# EAGLE board Fantastic Jaiks-Sango (EAGLE 9.7.0)

Size 220.81 x 114.8 mm. Coordinates in mm from the lower left corner, seen from the top.
Outline: 0,0 220.81,0 220.81,114.8 0,114.8 0,0
Copper layers (1*16): Top 0.035mm / dielectric 1.5mm / Bottom 0.035mm
Design rules "default": minimum track width 6mil, minimum drill 0.35mm, track to track 6mil, track to pad 6mil, pad to pad 6mil, via to via 6mil, smd to smd 6mil, copper to edge 40mil, drill to drill 6mil, minimum pad ring 10mil, minimum via ring 8mil, stop-mask expansion 4mil, vias tented up to drill 0mil, thermal gap 10mil

## Footprints (pad centres in the part's own frame; a part is rotated, then mirrored left to right if it is on the bottom)
BATTERY-GENERIC = drill 1.118 pad 3.15 octagon: + 2.54,0; - -2.54,0
LEDRD254W60D565H860B = drill 0.981 pad 1.581: 1 -1.27,0; 2 1.27,0
LEDRD254W60D565H860B_G = drill 0.981 pad 1.581: 1 -1.27,0; 2 1.27,0
MOTOR = drill 1.118 pad 3.15 octagon: + 2.54,0; - -2.54,0
RESAD1016W63L850D250B = drill 0.83 pad 1.43: 1 -5.08,0; 2 5.08,0
SWITCH-MOMENTARY-PTH-6.5MM = drill 1.016 pad 1.88: 1 -3.251,2.261; 2 3.251,2.261; 3 -3.251,-2.261; 4 3.251,-2.261
ARDUINO-UNO-R3-SHIELD = drill 1.016 pad 1.88: 3.3V 24.13,-2.54; 5V 24.13,0; A0 24.13,12.7; A1 24.13,15.24; A2 24.13,17.78; A3 24.13,20.32; A4 24.13,22.86; A5 24.13,25.4; AREF -24.13,-13.97; D2 -24.13,20.32; D3 -24.13,17.78; D4 -24.13,15.24; D5 -24.13,12.7; D6 -24.13,10.16; D7 -24.13,7.62; D8 -24.13,3.81; D9 -24.13,1.27; D10 -24.13,-1.27; D11 -24.13,-3.81; D12 -24.13,-6.35; D13 -24.13,-8.89; GND@0 24.13,2.54; GND@1 24.13,5.08; GND@2 -24.13,-11.43; IOREF 24.13,-7.62; NC 24.13,-10.16; RES 24.13,-5.08; RX -24.13,25.4; SCL -24.13,-19.05; SDA -24.13,-16.51; TX -24.13,22.86; VIN 24.13,7.62
DIP762W53P254L1969H508Q16B = drill 0.743 pad 1.343: 1 -3.81,8.89; 2 -3.81,6.35; 3 -3.81,3.81; 4 -3.81,1.27; 5 -3.81,-1.27; 6 -3.81,-3.81; 7 -3.81,-6.35; 8 -3.81,-8.89; 9 3.81,-8.89; 10 3.81,-6.35; 11 3.81,-3.81; 12 3.81,-1.27; 13 3.81,1.27; 14 3.81,3.81; 15 3.81,6.35; 16 3.81,8.89

## Placement (x,y rotation side)
BAT2  9V  [BATTERY-GENERIC]  212.26,98.4 270 top
D1  RED  [LEDRD254W60D565H860B]  172.84,54.74 0 top
D2  GREEN  [LEDRD254W60D565H860B_G]  185.54,54.74 0 top
M3  MOTOR_HDR  [MOTOR]  168.4,8.26 180 top
R1  1k  [RESAD1016W63L850D250B]  174.11,42.04 90 top
R2  1k  [RESAD1016W63L850D250B]  186.81,42.04 90 top
R3  1k  [RESAD1016W63L850D250B]  153.79,49.66 0 top
R4  1k  [RESAD1016W63L850D250B]  136.01,49.66 0 top
R5  1k  [RESAD1016W63L850D250B]  118.23,49.66 0 top
S2  SWITCH_MOMENTARY  [SWITCH-MOMENTARY-PTH-6.5MM]  161.41,35.69 90 top
S3  SWITCH_MOMENTARY  [SWITCH-MOMENTARY-PTH-6.5MM]  143.63,35.69 90 top
S4  SWITCH_MOMENTARY  [SWITCH-MOMENTARY-PTH-6.5MM]  125.85,35.69 90 top
U1  ARDUINO-UNO-R3-SHIELD  [ARDUINO-UNO-R3-SHIELD]  47.88,84.96 270 top
U2  L293E  [DIP762W53P254L1969H508Q16B]  205.86,43.31 90 top

## Library data of the parts
BAT2 M3 R1-R5 S2-S4 U1 U2 = Tinkercad
D1 = Tinkercad; CATEGORY: Opto-Electronic; SUB-CATEGORY: LED; VALUE: LED_RED
D2 = Tinkercad; CATEGORY: Opto-Electronic; SUB-CATEGORY: LED; VALUE: LED_GREEN

## Nets
BAT2+: BAT2.+ U2.8
BAT2-: BAT2.- R1.1 R2.1 R3.1 R4.1 R5.1 U2.4 U2.5 U2.12 U2.13
D1_C: D1.2 R1.2
D2_C: D2.2 R2.2
M3_+: M3.+ U2.3
M3_-: M3.- U2.6
S2_2: S2.1 S2.2
S2_3: S2.3 S2.4
S3_2: S3.1 S3.2
S3_3: S3.3 S3.4
S4_2: S4.1 S4.2
S4_3: S4.3 S4.4
U1_D5: U1.D5 U2.1
U1_D7: U1.D7 U2.2
U1_D8: U1.D8 U2.7
U1_D10: R5.2 U1.D10
U1_D12: R3.2 U1.D12

## Tracks (layer width: path | path; a pad name or v marks a point on that pad's centre or on a via)
BAT2+  (1 unrouted)
BAT2-  (9 unrouted)
D1_C  (1 unrouted)
D2_C  (1 unrouted)
M3_+  (1 unrouted)
M3_-  (1 unrouted)
S2_2  (1 unrouted)
S2_3  (1 unrouted)
S3_2  (1 unrouted)
S3_3  (1 unrouted)
S4_2  (1 unrouted)
S4_3  (1 unrouted)
U1_D5  (1 unrouted)
U1_D7  (1 unrouted)
U1_D8  (1 unrouted)
U1_D10  (1 unrouted)
U1_D12  (1 unrouted)